# EAGLE board MemExt1 (EAGLE 7.6.0)
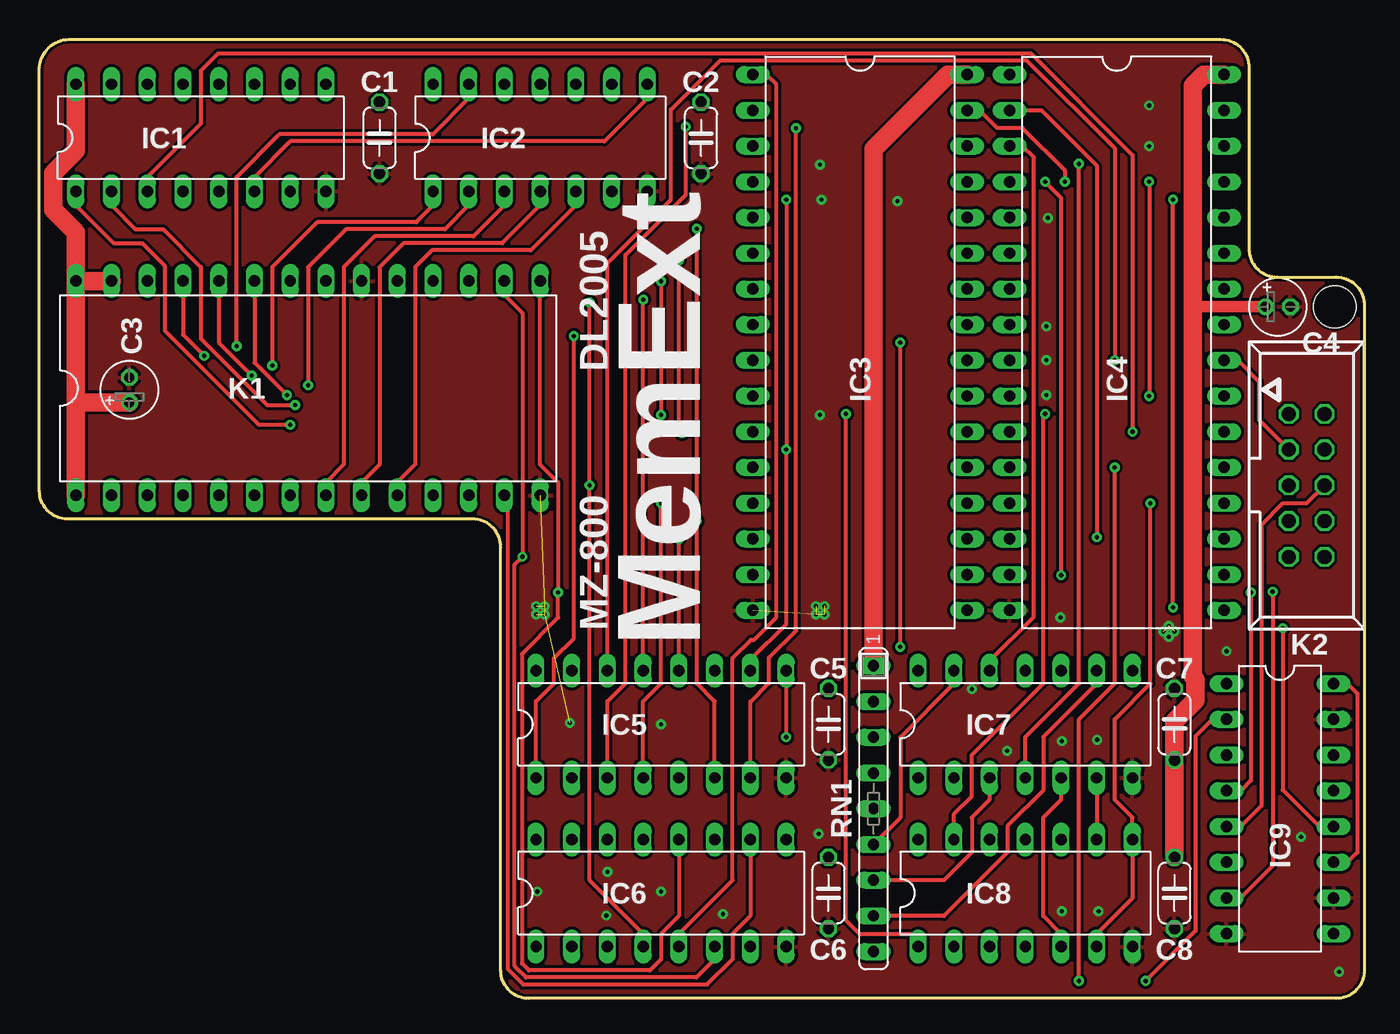
[diagram p0: board, top side]
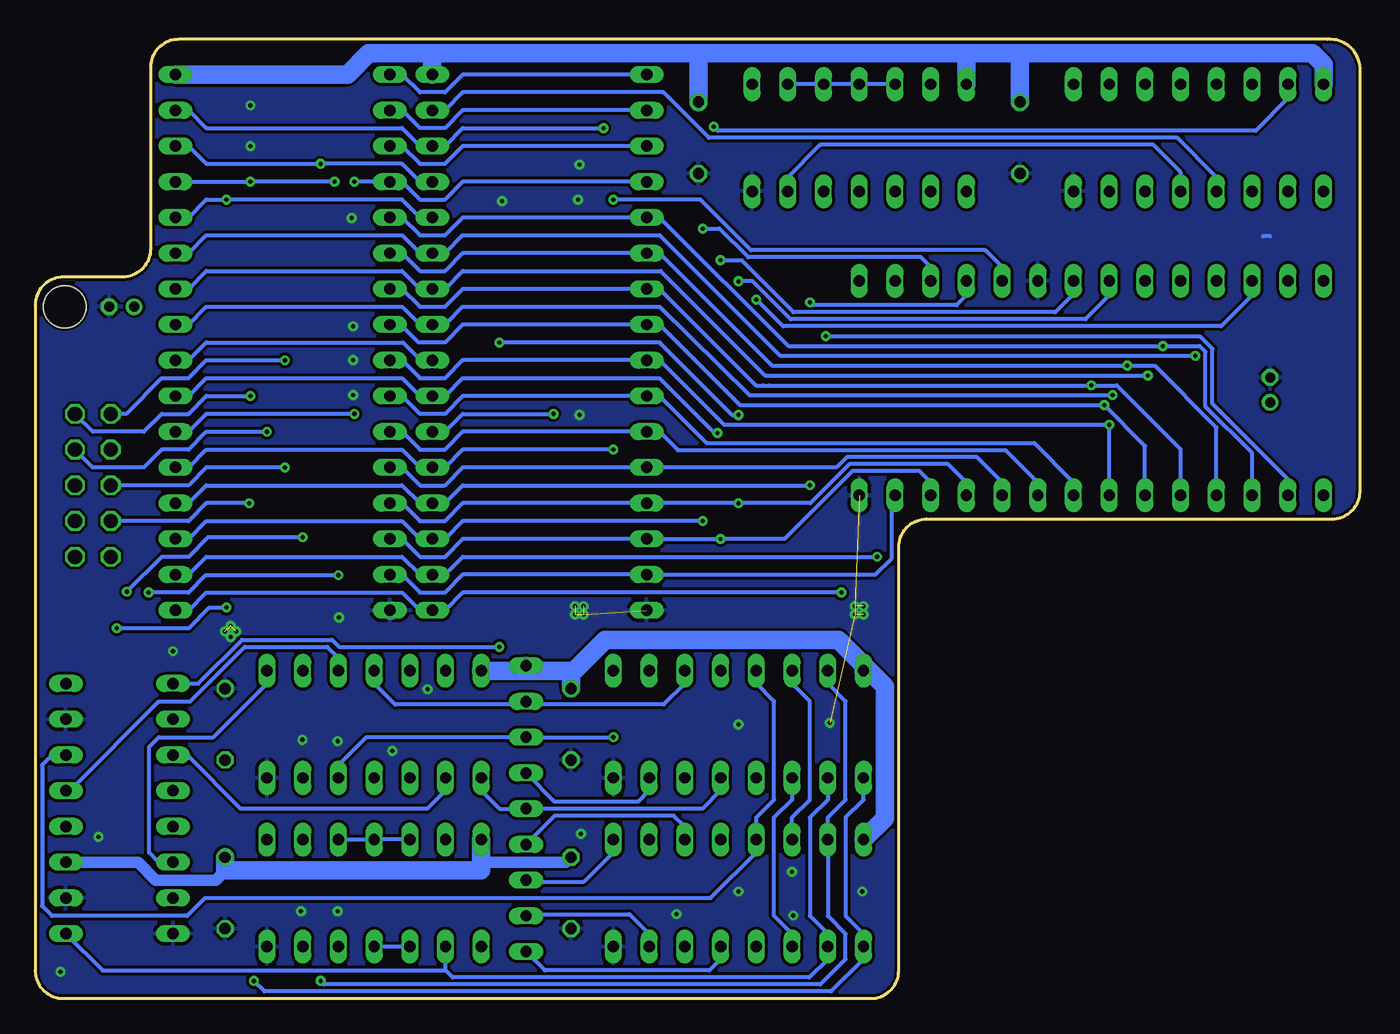
[diagram p1: board, bottom side, seen from below]

Size 94.2 x 68.2 mm. Coordinates in mm from the lower left corner, seen from the top.
Outline: 0,66.2 arc-90 2.3,68.2 84,68.2 arc-90 86,66.2 86,53.3 arc90 88,51.3 92.2,51.3 arc-90 94.2,49.3 94.2,2 arc-90 92.2,0 34.8,0 arc-90 32.8,2 32.8,32.1 arc90 30.8,34.1 2,34.1 arc-90 0,36.1 0,66.2
Copper layers (1*16): Top 0.035mm / dielectric 1.5mm / Bottom 0.035mm
Design rules "default *": minimum track width 10mil, minimum drill 24mil, track to track 8mil, track to pad 8mil, pad to pad 8mil, via to via 8mil, smd to smd 8mil, copper to edge 0.2mm, drill to drill 8mil, minimum pad ring 0.2mm, minimum via ring 0.2mm, stop-mask expansion 4mil, vias tented up to drill 0mil, thermal gap 10mil
Net classes: 1 supply: width 0.381 mm
Holes 3 mm at 92.1,49.19
tRestrict: area 95,46 to 103,64

## Footprints (pad centres in the part's own frame; a part is rotated, then mirrored left to right if it is on the bottom)
C050-024X044 = drill 0.813 octagon: 1 -2.54,0; 2 2.54,0
E1,8-4 = drill 0.711 pad 1.168: + -0.889,0 | drill 0.711 pad 1.168 octagon: - 0.889,0
DIL16 = drill 0.813 long: 1 -8.89,-3.81; 2 -6.35,-3.81; 3 -3.81,-3.81; 4 -1.27,-3.81; 5 1.27,-3.81; 6 3.81,-3.81; 7 6.35,-3.81; 8 8.89,-3.81; 9 8.89,3.81; 10 6.35,3.81; 11 3.81,3.81; 12 1.27,3.81; 13 -1.27,3.81; 14 -3.81,3.81; 15 -6.35,3.81; 16 -8.89,3.81
DIL14 = drill 0.813 long: 1 -7.62,-3.81; 2 -5.08,-3.81; 3 -2.54,-3.81; 4 0,-3.81; 5 2.54,-3.81; 6 5.08,-3.81; 7 7.62,-3.81; 8 7.62,3.81; 9 5.08,3.81; 10 2.54,3.81; 11 0,3.81; 12 -2.54,3.81; 13 -5.08,3.81; 14 -7.62,3.81
DIL32 = drill 0.813 long: 1 -19.05,-7.62; 2 -16.51,-7.62; 3 -13.97,-7.62; 4 -11.43,-7.62; 5 -8.89,-7.62; 6 -6.35,-7.62; 7 -3.81,-7.62; 8 -1.27,-7.62; 9 1.27,-7.62; 10 3.81,-7.62; 11 6.35,-7.62; 12 8.89,-7.62; 13 11.43,-7.62; 14 13.97,-7.62; 15 16.51,-7.62; 16 19.05,-7.62; 17 19.05,7.62; 18 16.51,7.62; 19 13.97,7.62; 20 11.43,7.62; 21 8.89,7.62; 22 6.35,7.62; 23 3.81,7.62; 24 1.27,7.62; 25 -1.27,7.62; 26 -3.81,7.62; 27 -6.35,7.62; 28 -8.89,7.62; 29 -11.43,7.62; 30 -13.97,7.62; 31 -16.51,7.62; 32 -19.05,7.62
DIL28-6 = drill 0.813 long: 1 -16.51,-7.62; 2 -13.97,-7.62; 3 -11.43,-7.62; 4 -8.89,-7.62; 5 -6.35,-7.62; 6 -3.81,-7.62; 7 -1.27,-7.62; 8 1.27,-7.62; 9 3.81,-7.62; 10 6.35,-7.62; 11 8.89,-7.62; 12 11.43,-7.62; 13 13.97,-7.62; 14 16.51,-7.62; 15 16.51,7.62; 16 13.97,7.62; 17 11.43,7.62; 18 8.89,7.62; 19 6.35,7.62; 20 3.81,7.62; 21 1.27,7.62; 22 -1.27,7.62; 23 -3.81,7.62; 24 -6.35,7.62; 25 -8.89,7.62; 26 -11.43,7.62; 27 -13.97,7.62; 28 -16.51,7.62
057-010-1 = drill 1 octagon: 1 -5.08,-1.27; 2 -5.08,1.27; 3 -2.54,-1.27; 4 -2.54,1.27; 5 0,-1.27; 6 0,1.27; 7 2.54,-1.27; 8 2.54,1.27; 9 5.08,-1.27; 10 5.08,1.27
SIL9 = drill 0.813 long: 1 -10.16,0; 2 -7.62,0; 3 -5.08,0; 4 -2.54,0; 5 0,0; 6 2.54,0; 7 5.08,0; 8 7.62,0; 9 10.16,0

## Placement (x,y rotation side)
C1  [C050-024X044]  24.18,61.2 270 top
C2  [C050-024X044]  47.04,61.2 270 top
C3  [E1,8-4]  6.4,43.28 90 top
C4  [E1,8-4]  88.05,49.19 0 top
C5  [C050-024X044]  56.1,19.5 270 top
C6  [C050-024X044]  56.1,7.5 270 top
C7  [C050-024X044]  80.7,19.5 90 top
C8  [C050-024X044]  80.7,7.5 270 top
IC1  74138  [DIL16]  11.48,61.2 0 top
IC2  7410  [DIL14]  35.61,61.2 0 top
IC3  29F040  [DIL32]  58.35,46.65 270 top
IC4  628512  [DIL32]  76.6,46.65 270 top
IC5  7489  [DIL16]  44.2,19.5 0 top
IC6  7489  [DIL16]  44.2,7.5 0 top
IC7  7404  [DIL14]  70.1,19.5 0 top
IC8  7402  [DIL14]  70.1,7.5 0 top
IC9  74157  [DIL16]  88.2,13.5 270 top
K1  MZ-800 PROM  [DIL28-6]  19.1,43.4 0 top
K2  X  [057-010-1]  90.1,36.49 270 top
RN1  [SIL9]  59.3,13.5 270 top

## Library data of the parts
C1-C8 = rcl
IC1 IC2 IC7 IC8 = 74ttl-din
IC3-IC6 K1 = ic-package
IC9 = 74xx-eu
K2 = con-panduit
RN1 = resistor-sil

## Nets
A0: IC2.5 IC3.12 IC4.12 K1.10
A1: IC2.4 IC3.11 IC4.11 K1.9
A2: IC2.3 IC3.10 IC4.10 K1.8
A3: IC1.1 IC3.9 IC4.9 K1.7
A4: IC1.2 IC3.8 IC4.8 K1.6
A5: IC2.2 IC3.7 IC4.7 K1.5
A6: IC2.1 IC3.6 IC4.6 K1.4
A7: IC2.13 IC3.5 IC4.5 K1.3
A8: IC3.27 IC4.27 K1.25
A9: IC3.26 IC4.26 K1.24
A10: IC3.23 IC4.23 K1.21
A11: IC3.25 IC4.25 K1.23
A12: IC5.1 IC6.1 IC9.2 K1.2
A13: IC5.13 IC6.13 IC9.14 K1.26
A14: IC5.14 IC6.14 K2.1
A15: IC5.15 IC6.15 K2.5
B12: IC3.4 IC4.4 IC9.4
B13: IC3.28 IC4.28 IC9.12
B14: IC3.29 IC4.30 IC7.4
B15: IC3.3 IC4.3 IC7.12
B16: IC3.2 IC4.2 IC9.7
B17: IC3.30 IC4.31 IC5.7 RN1.4
B18: IC3.1 IC4.1 IC6.5 RN1.9
D0: IC3.13 IC4.13 IC5.4 K1.11
D1: IC3.14 IC4.14 IC5.12 K1.12
D2: IC3.15 IC4.15 IC6.10 K1.13
D3: IC3.17 IC4.17 IC6.12 K1.15
D4: IC3.18 IC4.18 IC6.6 K1.16
D5: IC3.19 IC4.19 IC5.6 K1.17
D6: IC3.20 IC4.20 IC6.4 K1.18
D7: IC3.21 IC4.21 IC5.10 K1.19
GND [supply]: C1.2 C2.2 C3.- C4.- C5.2 C6.2 C7.2 C8.2 IC1.8 IC2.7 IC3.16 IC4.16 IC5.8 IC6.8 IC7.7 IC8.7 IC9.8 IC9.10 IC9.15 K1.14 K1.20
N$1: IC2.9 IC2.10 IC2.11 IC2.12
N$2: IC6.11 IC7.13 RN1.6
N$3: IC1.5 IC2.6
N$4: IC1.15 IC5.3 IC6.3
N$5: IC5.2 IC6.2 IC8.2 IC9.9
N$6: IC9.1 K1.22
N$7: IC3.24 IC4.24 K2.3
N$8: IC8.6 IC8.8 K2.7
N$9: IC8.3 IC8.4
N$10: IC8.10 IC8.11 IC8.12
N$11: IC4.22 IC8.13
N$12: IC3.22 IC8.1
N$13: IC1.3 K2.4
N$15: IC9.5 K2.6
N$16: IC7.6 IC8.9
N$17: IC6.9 IC7.3 RN1.7
N$18: IC5.9 IC7.5 IC8.5 RN1.3
N$19: IC6.7 IC7.9 RN1.8
N$20: IC1.4 IC3.31 IC4.29 K2.2
N$21: IC5.5 IC7.1 RN1.5
N$22: IC5.11 IC7.11 RN1.2
N$25: IC1.6 IC2.8
N$26: IC7.2 IC9.3
N$27: IC7.8 IC9.6
N$28: IC7.10 IC9.13
VCC [supply]: C1.1 C2.1 C3.+ C4.+ C5.1 C6.1 C7.1 C8.1 IC1.16 IC2.14 IC3.32 IC4.32 IC5.16 IC6.16 IC7.14 IC8.14 IC9.11 IC9.16 K1.1 K1.27 K1.28 RN1.1

## Tracks (layer width: path | path; a pad name or v marks a point on that pad's centre or on a via)
A0
  Top 0.3: IC2.5 38.15,56.4 34.95,53.2 27.92,53.2 26.72,52 26.72,37.97 25.45,36.7 K1.10
  Bottom 0.3: IC4.12 68.12,37.76 66.85,36.49 65.07,36.49 63.8,37.76 IC3.12 37.24,37.76 36.5,38.5 27.25,38.5 25.45,36.7 K1.10
A1
  Top 0.3: IC2.4 35.61,56.4 32.91,53.7 25.88,53.7 24.18,52 24.18,37.97 22.91,36.7 K1.9
  Bottom 0.3: IC4.11 68.12,40.3 66.85,39.03 65.07,39.03 63.8,40.3 IC3.11 49.8,40.3 48.5,39 25.21,39 22.91,36.7 K1.9
A2
  Top 0.3: IC2.3 33.07,56.4 30.87,54.2 23.84,54.2 21.64,52 21.64,37.97 20.37,36.7 K1.8
  Bottom 0.3: IC4.10 68.12,42.84 66.85,41.57 65.07,41.57 63.8,42.84 IC3.10 49.8,42.84 46.46,39.5 23.17,39.5 20.37,36.7 K1.8
A3  (via drill 0.3)
  Top 0.3: IC1.1 2.59,56.4 5.29,53.7 7.3,53.7 8.94,52.06 8.94,47.46 15.6,40.8 v17.83,40.8
  Bottom 0.3: IC4.9 68.12,45.38 66.85,44.11 65.07,44.11 63.8,45.38 IC3.9 49.8,45.38 45.22,40.8 v17.83,40.8 K1.7
A4  (via drill 0.3)
  Top 0.3: IC1.2 5.13,56.4 6.83,54.7 8.8,54.7 11.48,52.02 11.48,46.92 16.2,42.2 v18.19,42.2
  Bottom 0.3: IC4.8 68.22,47.92 66.95,46.65 65.07,46.65 63.8,47.92 IC3.8 49.8,47.92 44.08,42.2 v18.19,42.2 15.29,39.3 K1.6
A5  (via drill 0.3)
  Top 0.3: IC2.2 30.53,56.4 28.83,54.7 21.8,54.7 19.1,52 v19.1,43.6
  Bottom 0.3: IC4.7 68.12,50.46 66.85,49.19 65.07,49.19 63.8,50.46 IC3.7 49.8,50.46 42.94,43.6 42.44,43.6 42,43.6 v19.1,43.6 17.3,43.6 12.75,39.05 K1.5
A6  (via drill 0.3)
  Top 0.3: IC2.1 27.99,56.4 26.79,55.2 19.76,55.2 16.56,52 v16.56,45
  Bottom 0.3: IC4.6 68.12,53 66.85,51.73 65.07,51.73 63.8,53 IC3.6 49.8,53 41.8,45 v16.56,45 14.6,45 10.21,40.61 K1.4
A7  (via drill 0.3)
  Top 0.3: IC2.13 30.53,64 27.98,61.45 17.05,61.45 14.02,58.42 v14.02,46.4
  Bottom 0.3: IC4.5 68.12,55.54 66.85,54.27 65.07,54.27 63.8,55.54 IC3.5 49.8,55.54 40.66,46.4 v14.02,46.4 11.4,46.4 11,46 11,42.1 7.67,38.77 K1.3
A8  (via drill 0.3)
  Top 0.3: K1.25 10.21,47.2 v11.71,45.7
  Bottom 0.3: IC4.27 83.3,53 82.03,54.27 68.12,54.27 66.85,53 IC3.27 65.07,53 63.8,54.27 49.8,54.27 41.23,45.7 v11.71,45.7
A9  (via drill 0.3)
  Top 0.3: K1.24 12.75,46.65 v15.1,44.3
  Bottom 0.3: IC4.26 83.3,50.46 82.03,51.73 68.12,51.73 66.85,50.46 IC3.26 65.07,50.46 63.8,51.73 49.73,51.73 42.3,44.3 v15.1,44.3
A10  (via drill 0.3)
  Top 0.3: v45.47,52.5 45.47,40.42 v45.69,40.2
  Bottom 0.3: K1.21 20.37,50.1 21.67,48.8 40.3,48.8 44,52.5 v45.47,52.5 | IC4.23 83.3,42.84 82.03,44.11 68.12,44.11 66.85,42.84 IC3.23 65.07,42.84 63.8,44.11 49.8,44.11 45.89,40.2 v45.69,40.2
A11  (via drill 0.3)
  Top 0.3: K1.23 15.29,45.21 v17.6,42.9
  Bottom 0.3: IC4.25 83.3,47.92 82.03,49.19 68.12,49.19 66.85,47.92 IC3.25 65.07,47.92 63.8,49.19 49.8,49.19 43.41,42.9 v17.6,42.9
A12  (via drill 0.3)
  Top 0.3: IC5.1 35.31,21.13 36.58,22.4 36.58,24.2 38,25.62 v38,47.1 | v78.65,1.25 82.2,4.8 82.2,18.65 83.4,19.85 IC9.2
  Bottom 0.3: IC5.1 35.31,14.13 36.58,12.87 36.58,5.87 35.31,4.6 IC6.1 35.31,2.8 37.61,0.5 77.9,0.5 v78.65,1.25 | v38,47.1 11.4,47.1 10.5,46.2 10.5,42.3 5.13,36.93 K1.2
A13  (via drill 0.3)
  Top 0.3: IC5.13 v42.93,49.7
  Bottom 0.3: IC9.14 93,17.31 93.7,16.61 93.7,6.58 93,5.88 83.4,5.88 82.13,7.15 46.18,7.15 42.93,10.4 IC6.13 42.93,12.87 41.66,14.13 41.66,21.13 42.93,22.4 IC5.13 | K1.26 7.67,50 9.87,47.8 41.03,47.8 v42.93,49.7
A14  (via drill 0.3)
  Top 0.3: IC5.14 40.39,52.29 44.9,56.8 44.9,63.2 48.4,66.7 70.2,66.7 76.45,60.45 v76.45,45.38
  Bottom 0.3: IC6.14 40.39,12.87 39.12,14.13 39.12,21.13 40.39,22.4 IC5.14 | v76.45,45.38 82.03,45.38 83.3,44.11 85.2,44.11 87.74,41.57 K2.1
A15  (via drill 0.3)
  Top 0.3: v73.91,1.25 73.91,19.86 76.45,22.4 v76.45,37.76
  Bottom 0.3: IC5.15 37.85,22.4 36.58,21.13 36.58,14.13 37.85,12.87 IC6.15 37.85,5.87 36.58,4.6 36.58,2.8 38.38,1 73.66,1 v73.91,1.25 | K2.5 83.3,36.49 82.03,37.76 v76.45,37.76
B12  (via drill 0.3)
  Top 0.3: v72.64,30.1 72.64,56.94 v71.5,58.08 | IC9.4 85.4,14.77 86.14,15.51 v86.14,28.87
  Bottom 0.3: IC3.4 63.8,58.08 65.07,56.81 66.85,56.81 68.12,58.08 IC4.4 v71.5,58.08 | v86.14,28.87 83.3,28.87 82.07,30.1 v72.64,30.1
B13  (via drill 0.3)
  Top 0.3: IC9.12 91,12.23 88.4,14.83 v88.4,26.33 | v80.6,27.8 v80.6,56.81
  Bottom 0.3: IC3.28 66.85,55.54 68.12,56.81 v80.6,56.81 82.03,56.81 83.3,55.54 IC4.28 | v80.6,27.8 81.83,27.8 83.3,26.33 v88.4,26.33
B14  (via drill 0.3)
  Top 0.3: IC7.4 70.1,18.59 73.91,22.4 v73.91,59.35
  Bottom 0.3: IC3.29 66.85,58.08 68.12,59.35 v73.91,59.35 82.03,59.35 83.3,60.62 IC4.30
B15
  Top 0.3: IC7.12 67.56,24 70.7,27.14 70.7,59.82 69.9,60.62 IC4.3
  Bottom 0.3: IC4.3 68.12,60.62 66.85,59.35 65.07,59.35 63.8,60.62 IC3.3
B16  (via drill 0.3)
  Top 0.3: v75.18,32.8 75.18,59.22 71.24,63.16 IC4.2 | IC9.7 85.4,7.15 87.68,9.43 v87.68,28.93
  Bottom 0.3: IC4.2 68.12,63.16 66.85,61.89 65.07,61.89 63.8,63.16 IC3.2 | v75.18,32.8 81.91,32.8 83.3,31.41 85.2,31.41 v87.68,28.93
B17  (via drill 0.3)
  Top 0.3: IC5.7 50.55,21.1 51.85,22.4 51.85,24.2 53.8,26.15 v53.8,61.89
  Bottom 0.3: RN1.4 57.26,14 51.35,14 50.55,14.8 IC5.7 | v53.8,61.89 63.8,61.89 65.07,60.62 IC3.30 66.85,60.62 68.12,61.89 82.03,61.89 83.3,63.16 IC4.31
B18
  Top 0.3: IC6.5 45.47,4.6 49.28,8.41 49.28,24.2 50.58,25.5 50.8,25.5 52.4,27.1 52.4,65 51.7,65.7 IC3.1
  Bottom 0.3: IC3.1 63.8,65.7 65.07,64.43 66.85,64.43 68.12,65.7 IC4.1 | IC6.5 45.47,2.8 46.27,2 57.96,2 RN1.9
D0  (via drill 0.3)
  Top 0.3: IC5.4 42.93,21.13 44.2,22.4 v44.2,35.22
  Bottom 0.3: IC4.13 68.12,35.22 66.85,33.95 65.07,33.95 63.8,35.22 IC3.13 v44.2,35.22 39.08,35.22 36.3,38 29.29,38 27.99,36.7 K1.11
D1  (via drill 0.3)
  Top 0.3: IC5.12 v45.47,32.68
  Bottom 0.3: IC4.14 68.12,32.68 66.85,31.41 65.07,31.41 63.8,32.68 IC3.14 v45.47,32.68 40.92,32.68 36.1,37.5 31.33,37.5 30.53,36.7 K1.12
D2
  Top 0.3: IC6.10 50.55,5.87 49.28,4.6 49.28,2.8 47.48,1 34.4,1 33.3,2.1 33.3,35.55 K1.13
  Bottom 0.3: IC4.15 68.12,30.14 66.85,28.87 65.07,28.87 63.8,30.14 IC3.15 34.46,30.14 33.3,31.3 33.3,35.55 K1.13
D3  (via drill 0.3)
  Top 0.3: IC6.12 45.47,5.87 44.2,4.6 44.2,2.8 43.4,2 34.8,2 34.3,2.5 34.3,24.5 36.88,27.08 v36.88,28.87 36.88,36.7 35.61,37.97 K1.15
  Bottom 0.3: v36.88,28.87 63.8,28.87 65.07,27.6 IC3.17 66.85,27.6 68.12,28.87 82.03,28.87 83.3,27.6 IC4.17
D4  (via drill 0.3)
  Top 0.3: IC6.6 48.01,2.8 46.71,1.5 34.6,1.5 33.8,2.3 33.8,30.87 v34.34,31.41 34.34,48.73 33.07,50 K1.16
  Bottom 0.3: v34.34,31.41 63.8,31.41 65.07,30.14 IC3.18 66.85,30.14 68.12,31.41 82.03,31.41 83.3,30.14 IC4.18
D5  (via drill 0.3)
  Top 0.3: IC5.6 48.01,21.13 46.74,22.4 v46.74,33.95 v46.74,54.75
  Bottom 0.3: v46.74,33.95 63.8,33.95 65.07,32.68 IC3.19 66.85,32.68 68.12,33.95 82.03,33.95 83.3,32.68 IC4.19 | K1.17 30.53,52 31.23,52.7 43.5,52.7 45.55,54.75 v46.74,54.75
D6  (via drill 0.3)
  Top 0.3: IC6.4 42.93,4.6 39.12,8.41 v39.12,36.49 v39.12,49.5
  Bottom 0.3: v39.12,36.49 63.8,36.49 65.07,35.22 IC3.20 66.85,35.22 68.12,36.49 82.03,36.49 83.3,35.22 IC4.20 | K1.18 27.99,50 28.69,49.3 38.92,49.3 v39.12,49.5
D7  (via drill 0.3)
  Top 0.3: IC5.10 50.55,24.1 53.1,26.65 v53.1,39.03 v53.1,56.81
  Bottom 0.3: v53.1,39.03 63.8,39.03 65.07,37.76 IC3.21 66.85,37.76 68.12,39.03 82.03,39.03 83.3,37.76 IC4.21 | K1.19 25.45,52 26.65,53.2 43.3,53.2 46.91,56.81 v53.1,56.81
GND  (via drill 0.3)  (11 unrouted)
  Bottom 0.3: 6.4,54.2 6.9,54.2
  Bottom 1.3: IC4.16 68.9,27.6
  other vias: 35.91,27.9 35.31,27.9 35.31,27.3 35.91,27.3 55.81,27.3 79.91,26.1 55.21,27.3 55.21,27.9 55.81,27.9 80.31,26.5 80.31,25.7 80.71,26.1 44.2,19.5 44.2,7.6 84.4,24.7 72.7,18.3 68.8,17.6 72.7,6.2 75.3,6.2 75.2,18.4 92.4,1.9 89.7,11.5 72.6,27.1 71.6,47.8 71.6,45.4 71.6,42.9 71.7,55.5 78.9,60.6 78.9,63.5 61,56.7 55.5,41.5 66.3,22 55.6,56.8 55.5,59.3 40.3,5.9 35.4,7.6 40.4,9 37.71,19.6 48.6,6 55.4,11.7
  pour Bottom (isolate 0.2, rank 6): 0,0 94.2,0 94.2,68.2 0,68.2
  pour Top (isolate 0.2, rank 6): 94.2,0 94.2,68.2 0,68.2 0,0
N$1
  Bottom 0.3: IC2.12 IC2.11 IC2.10 IC2.9
N$2
  Top 0.3: IC7.13 65.02,22.4 61.2,18.58 61.2,12.86 RN1.6
  Bottom 0.3: RN1.6 57.26,13 48.81,13 48.01,12.2 IC6.11
N$3
  Bottom 0.3: IC1.5 12.75,58.75 14.7,60.7 38.39,60.7 40.69,58.4 IC2.6
N$4  (via drill 0.3)
  Top 0.3: IC5.3 40.39,21.13 41.66,22.4 41.66,52.86 45.96,57.16 v45.96,62
  Bottom 0.3: IC1.15 5.13,64 7.43,61.7 45.66,61.7 v45.96,62 | IC5.3 40.39,14.13 41.66,12.87 41.7,12.87 41.7,5.91 40.39,4.6 IC6.3
N$5
  Bottom 0.3: IC5.2 37.85,14.13 39.12,12.87 39.12,5.87 37.85,4.6 IC6.2 37.85,2.8 39.15,1.5 64.52,1.5 65.02,2 | IC9.9 89.4,2 65.02,2 | 65.02,2 IC8.2
N$6  (via drill 0.3)
  Top 0.3: v61.2,25 v61.2,46.65 | v44.2,51 v44.2,41.5
  Bottom 0.3: v61.2,25 72.6,25 73.1,25.5 79.5,25.5 82.61,22.39 IC9.1 | K1.22 17.83,50 19.53,48.3 40.5,48.3 43.2,51 v44.2,51 | v61.2,46.65 49.8,46.65 44.65,41.5 v44.2,41.5
N$7
  Top 0.3: IC4.24 85.2,45.38 86.7,43.88 86.7,41.16 K2.3
  Bottom 0.3: IC3.24 66.78,45.38 68.05,46.65 82.03,46.65 83.3,45.38 IC4.24
N$8  (via drill 0.3)
  Top 0.3: IC8.6 75.18,4.6 77.72,7.14 IC8.8 77.72,12.87 76.45,14.13 76.45,19.86 78.99,22.4 v78.99,35.22
  Bottom 0.3: K2.7 83.3,33.95 82.03,35.22 v78.99,35.22
N$9
  Bottom 0.3: IC8.3 IC8.4
N$10
  Bottom 0.3: IC8.12 IC8.11 IC8.10
N$11  (via drill 0.3)
  Top 0.3: IC8.13 65.02,13.12 66.29,14.39 66.29,17.32 71.37,22.4 71.37,41.44 v71.5,41.57
  Bottom 0.3: IC4.22 83.3,40.3 82.03,41.57 v71.5,41.57
N$12  (via drill 0.3)
  Top 0.3: IC8.1 62.48,4.61 58.29,4.61 57.35,5.55 v57.35,41.57
  Bottom 0.3: IC3.22 65.07,40.3 63.8,41.57 v57.35,41.57
N$13  (via drill 0.3)
  Top 0.3: v77.72,40.3 77.72,59.98 70.5,67.2 12.7,67.2 11.5,66 11.5,62.23 7.67,58.4 IC1.3
  Bottom 0.3: v77.72,40.3 82.03,40.3 83.3,39.03 85.2,39.03 86.47,37.76 90.1,37.76 K2.4
N$15
  Top 0.3: IC9.5 85.4,12.23 86.9,13.73 86.9,33.7 88.42,35.22 90.1,35.22 K2.6
N$16
  Top 0.3: IC7.6 IC8.9
N$17
  Top 0.3: IC7.3 67.56,14.13 66.29,12.87 66.29,10.4 64.31,8.42 RN1.7
  Bottom 0.3: RN1.7 59.18,8.3 55.19,8.3 53.09,10.4 IC6.9
N$18  (via drill 0.3)
  Top 0.3: IC5.9 v53.09,18.58 | IC8.5 72.64,4.6 71.37,5.87 71.37,12.87 72.64,14.13 IC7.5
  Bottom 0.3: v53.09,18.58 RN1.3 70.66,18.58 72.64,16.6 IC7.5
N$19
  Top 0.3: IC7.9 75.18,22.4 71.37,18.59 71.37,14.8 68.83,12.26 68.83,10.4 64.31,5.88 RN1.8
  Bottom 0.3: RN1.8 59.18,6 51.95,6 50.55,4.6 IC6.7
N$20  (via drill 0.3)
  Top 0.3: IC3.31 66.85,63.16 68.12,61.89 69.9,61.89 72.9,58.89 v72.9,58.08 | v78.9,58.08 v78.9,42.84
  Bottom 0.3: IC1.4 10.21,58.4 13.01,61.2 46.3,61.2 49.53,64.43 63.8,64.43 65.07,63.16 IC3.31 | v78.9,42.84 82.03,42.84 83.3,41.57 85.2,41.57 86.47,40.3 90.1,40.3 K2.2 | IC4.29 v78.9,58.08 v72.9,58.08
N$21
  Bottom 0.3: IC5.5 45.47,14.8 46.77,13.5 RN1.5 61.18,13.5 62.48,14.8 IC7.1
N$22
  Bottom 0.3: IC5.11 48.01,22.4 49.51,20.9 59.3,20.9 | 59.3,20.9 68.6,20.9 70.1,22.4 IC7.11 | RN1.2 59.3,20.9
N$25
  Top 0.3: IC2.8 43.23,64 40.18,60.95 17.84,60.95 15.29,58.4 IC1.6
N$26
  Bottom 0.3: IC7.2 65.02,14.8 66.32,13.5 79.59,13.5 83.4,17.31 IC9.3
N$27
  Bottom 0.3: IC7.8 77.72,22.4 81.54,18.58 85.4,18.58 86.1,17.88 86.1,10.39 85.4,9.69 IC9.6
N$28
  Bottom 0.3: IC7.10 72.64,24.2 73.44,25 79.3,25 83.18,21.12 85.4,21.12 91.75,14.77 IC9.13
VCC
  Top 0.3: IC9.16 93,22.39 93.7,21.69 93.7,10.39 93,9.69 IC9.11
  Top 0.8: C4.+ 82,49.19 82,49.3
  Top 1.3: IC1.16 2.59,60.29 1,58.7 1,56.1 2.59,54.51 K1.28 | K1.27 K1.28 | K1.28 2.59,42.39 | K1.1 2.59,42.3 2.59,42.39 | C8.1 C7.1 80.7,19.7 82.2,21.2 82.2,22.7 82,22.9 82,49.3 82,64.9 82.8,65.7 IC4.32 | RN1.1 59.3,60.4 64.6,65.7 IC3.32 | C3.+ 2.59,42.39
  Bottom 0.8: 62.48,9.6 62.48,9.69 56.45,9.69 C6.1 | 80.7,9.1 81.38,8.42 85.62,8.42 86.89,9.69 IC9.11
  Bottom 1.3: IC1.16 2.59,66.39 3.4,67.2 24.18,67.2 | 24.18,67.2 27.99,67.2 | 27.99,67.2 47.04,67.2 | 47.04,67.2 65.97,67.2 | 65.97,67.2 70.5,67.2 72,65.7 IC4.32 | C1.1 24.18,67.2 | IC2.14 27.99,67.2 | C2.1 47.04,67.2 | IC3.32 65.97,67.2 | 35.1,23.5 37.1,25.5 53.7,25.5 55.89,23.31 56.1,23.31 | 35.1,23.5 33.8,22.2 33.8,12.82 IC6.16 | IC5.16 35.1,23.31 35.1,23.5 | 56.1,23.31 59.3,23.31 | 59.3,23.31 IC7.14 | C5.1 56.1,23.31 | RN1.1 59.3,23.31 | IC8.14 62.48,9.6 62.48,9.1 80.7,9.1 C8.1

## Text on the board
tPlace: DL2005 | MemExt | MZ-800